# EAGLE board Box_Top (EAGLE 6.1)
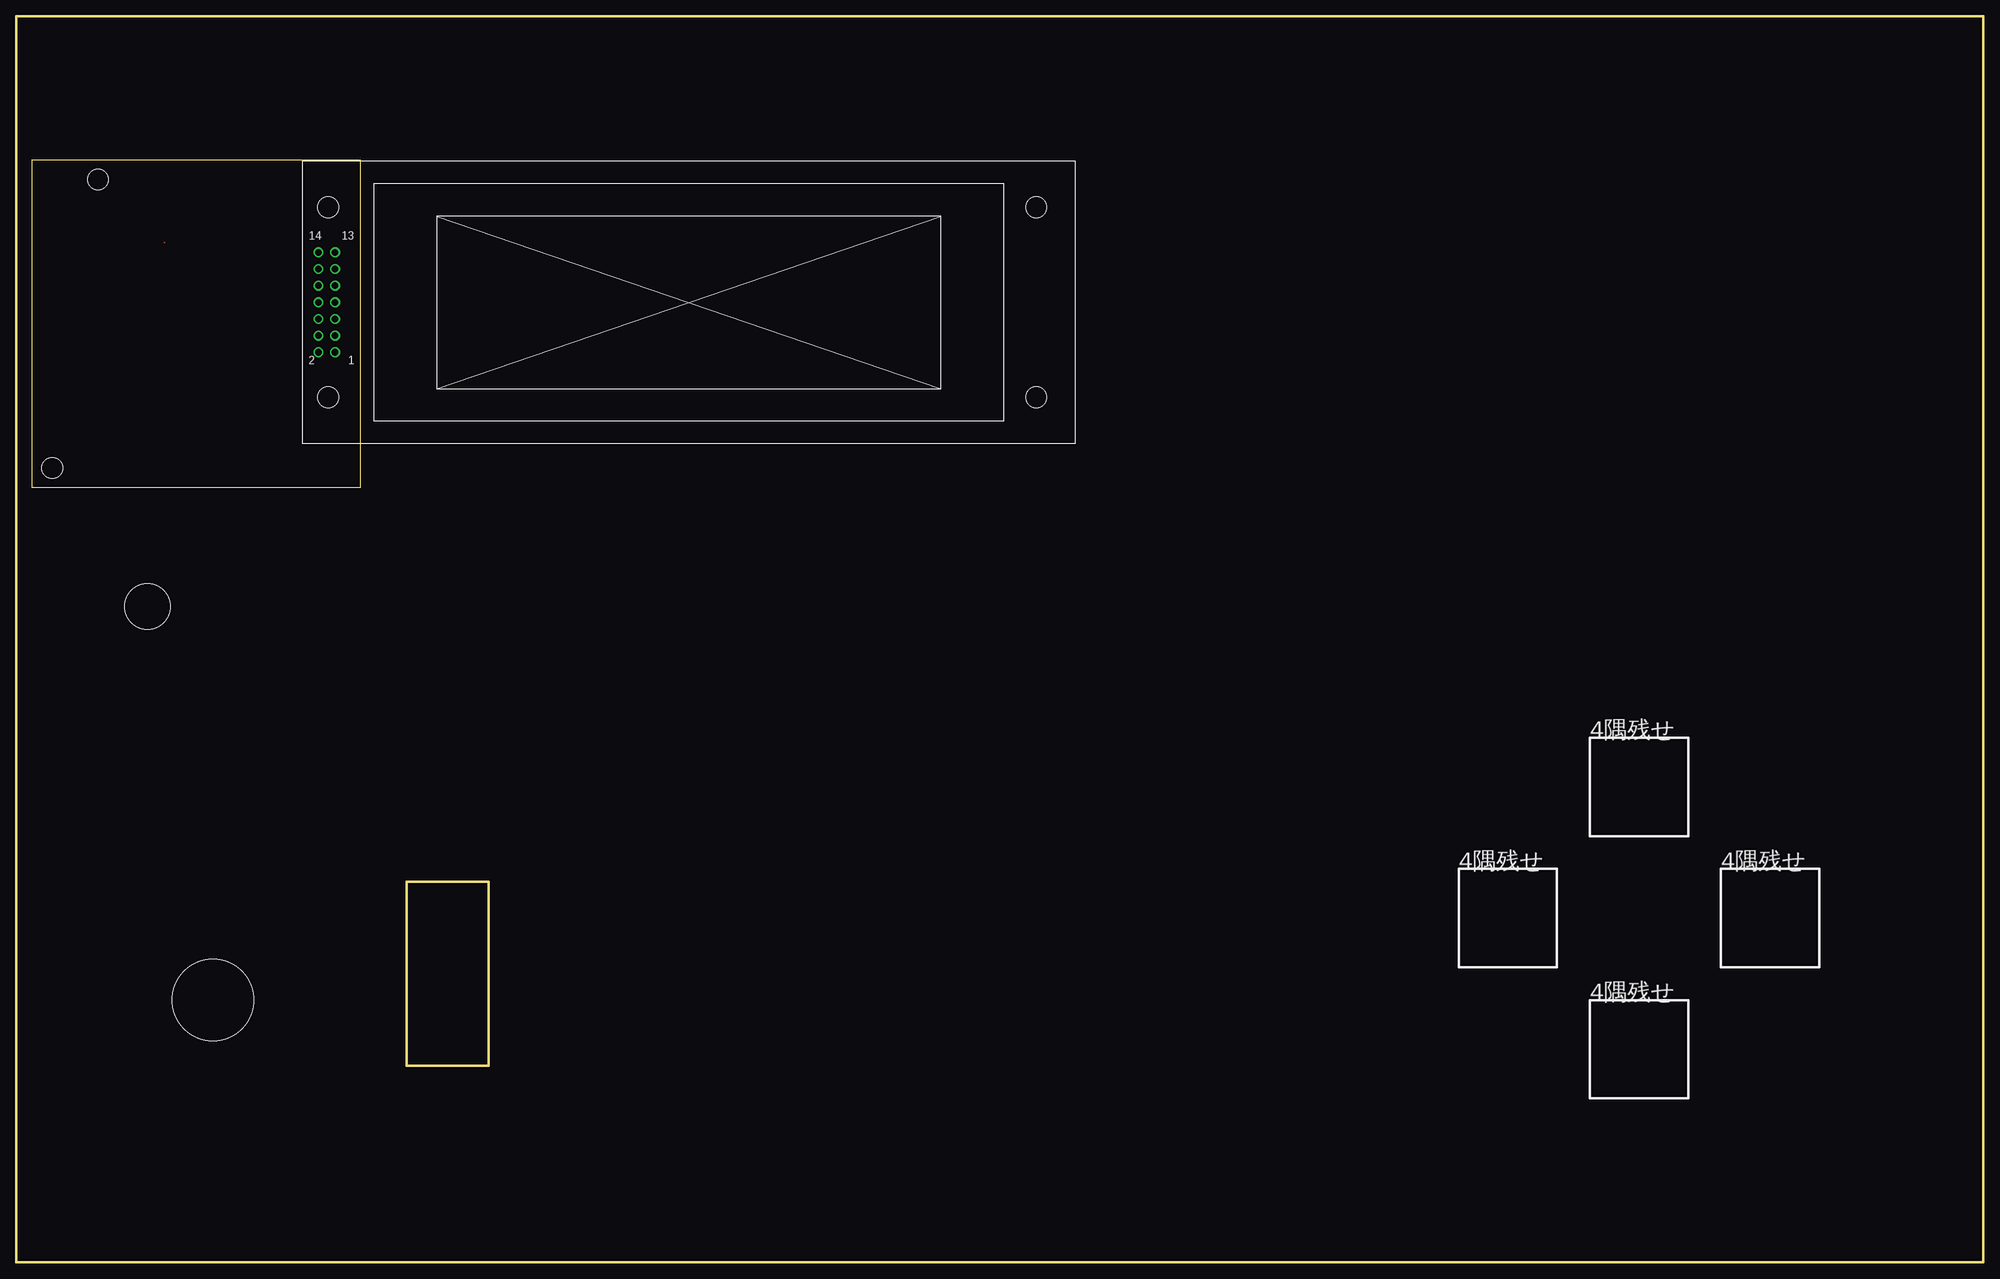
[diagram p0: board, top side]
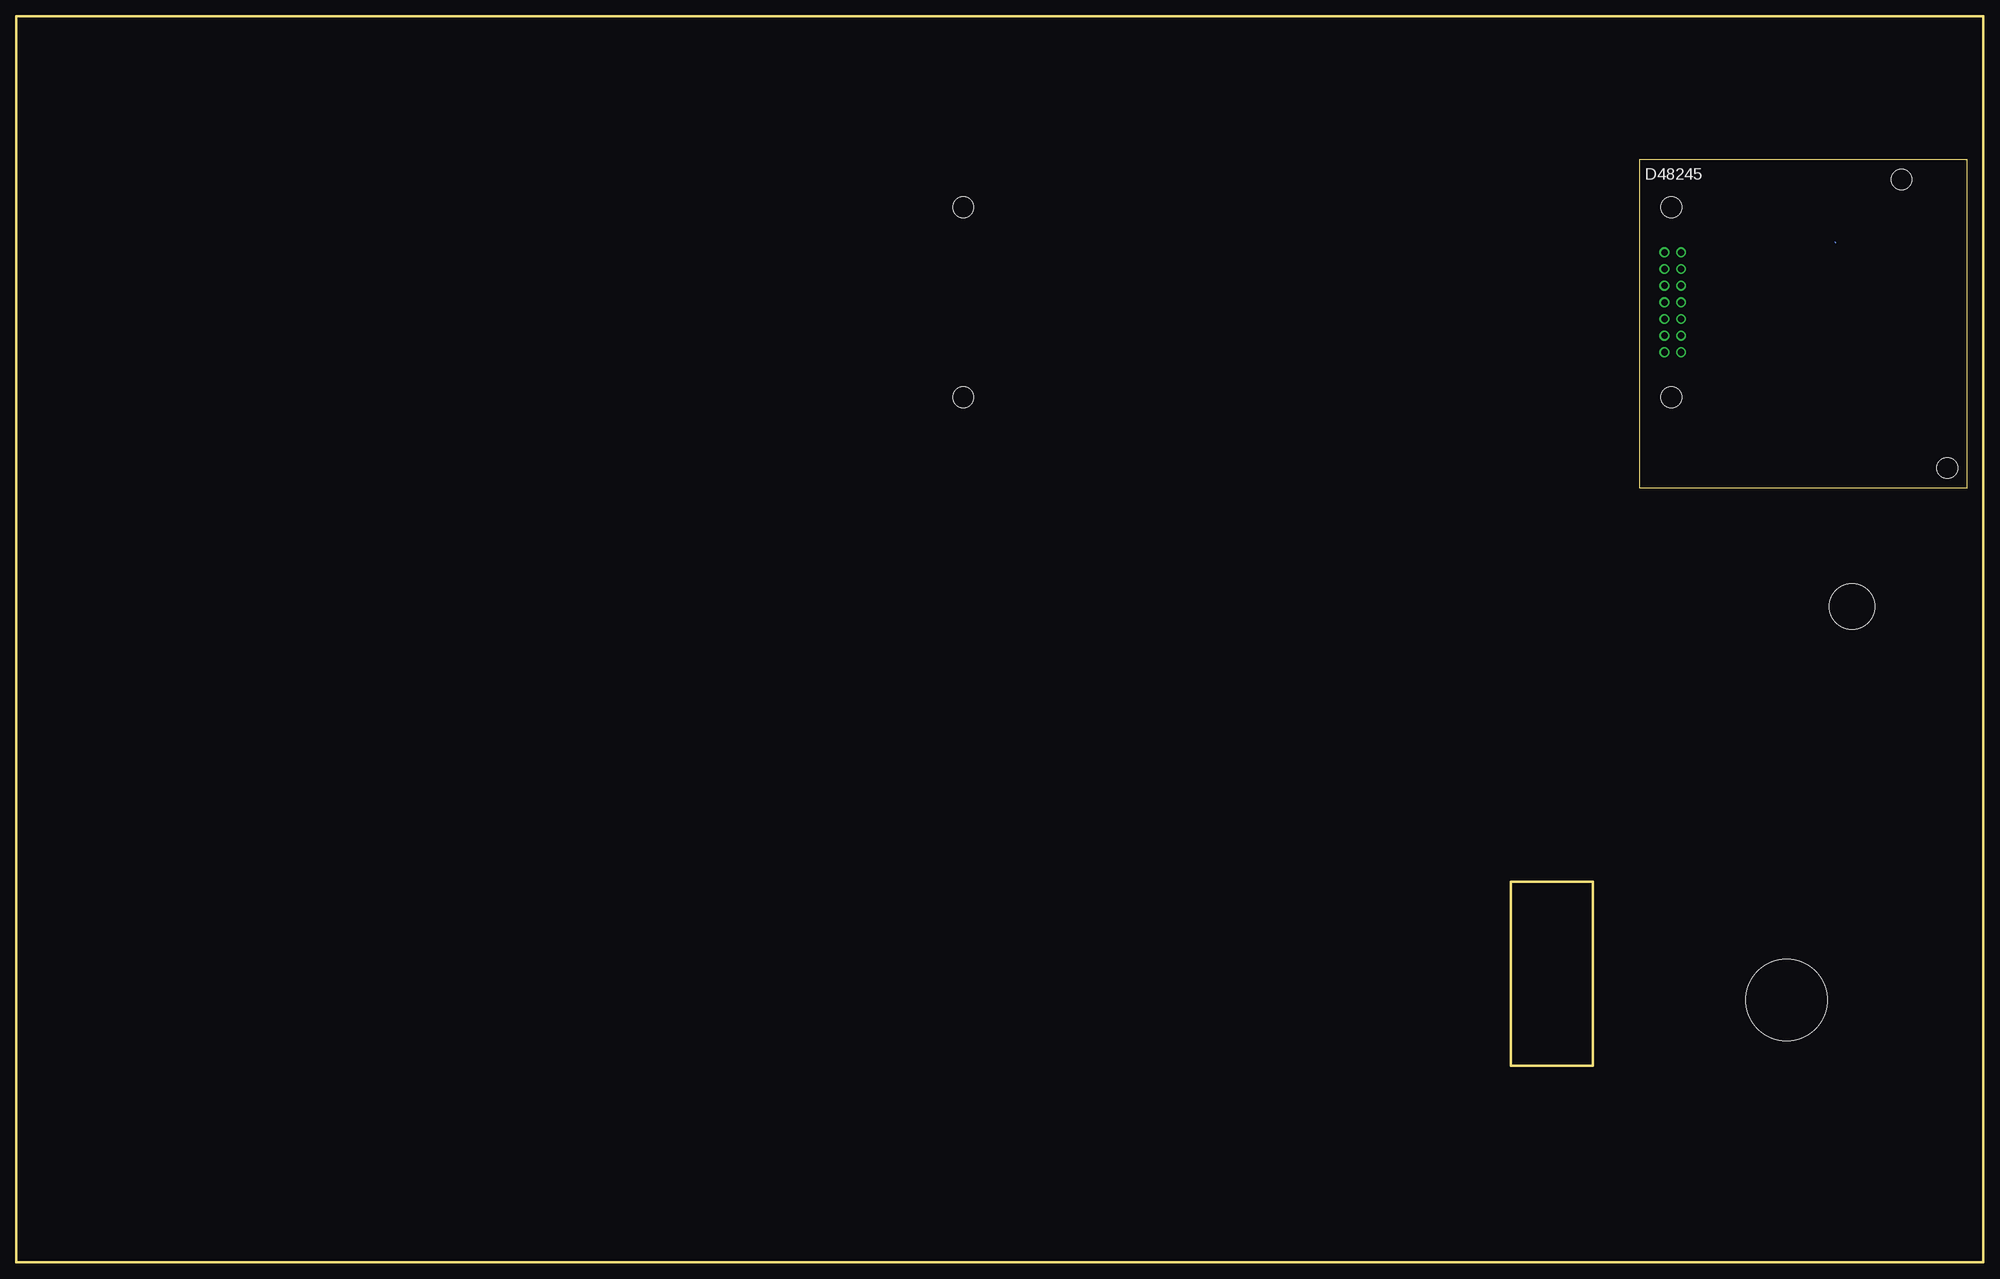
[diagram p1: board, bottom side, seen from below]

Size 300 x 190 mm. Coordinates in mm from the lower left corner, seen from the top.
Outline: 0,190 0,0 300,0 300,190 0,190
Outline: 52.45,118.14 2.45,118.14 2.45,168.14 52.45,168.14 52.45,118.14
Copper layers (1*16): Top 0.035mm / dielectric 1.5mm / Bottom 0.035mm
Design rules: minimum track width 10mil, minimum drill 24mil, track to track 8mil, track to pad 8mil, pad to pad 8mil, via to via 8mil, smd to smd 8mil, copper to edge 40mil, drill to drill 8mil, minimum pad ring 10mil, minimum via ring 8mil, stop-mask expansion 4mil, vias tented up to drill 0mil, thermal gap 10mil
Net classes: 2 supply_5v: width 1.27 mm, drill 0.508 mm, clearance 0.508 mm; 4 gnd: width 0.254 mm, drill 1.016 mm
Holes 3.2 mm at 12.45,165.14 5.45,121.14
Holes 12.5 mm at 30,40
Holes 7 mm at 20,100

## Footprints (pad centres in the part's own frame; a part is rotated, then mirrored left to right if it is on the bottom)
SC2004 = drill 1: 1 5.04,13.88; 2 2.5,13.88; 3 5.04,16.42; 4 2.5,16.42; 5 5.04,18.96; 6 2.5,18.96; 7 5.04,21.5; 8 2.5,21.5; 9 5.04,24.04; 10 2.5,24.04; 11 5.04,26.58; 12 2.5,26.58; 13 5.04,29.12; 14 2.5,29.12 | hole 3.2: 4,36; 4,7; 112,7; 112,36

## Placement (x,y rotation side)
U$1  SC2004  [SC2004]  43.57,124.9 0 top

## Library data of the parts
U$1 = myparts

## Nets
GND [gnd]: U$1.1
LCD_VO: U$1.3
S$3: U$1.5
S$4: U$1.7
S$5: U$1.9
S$6: U$1.11
S$8: U$1.13
S$9: U$1.14

## Tracks (layer width: path | path; a pad name or v marks a point on that pad's centre or on a via)
S$11  (1 unrouted)
  Top 0.152: 22.58,155.53 22.63,155.53
  Bottom 0.152: 22.58,155.42 22.58,155.53 22.63,155.53

## Text on the board
tPlace: 4隅残せ | 4隅残せ | 4隅残せ | 4隅残せ
bNames: D48245